# Altium PCB PIC精简开发板.PCBDOC (part 1 of 2)
Units mm, origin at the board's own origin, x right, y up, seen from the top; angles counter-clockwise.
Board outline 152.4 x 101.6 mm, 2 copper layers (Top Layer, Bottom Layer); 40 components, 58 nets, 198 pads, 47 vias.
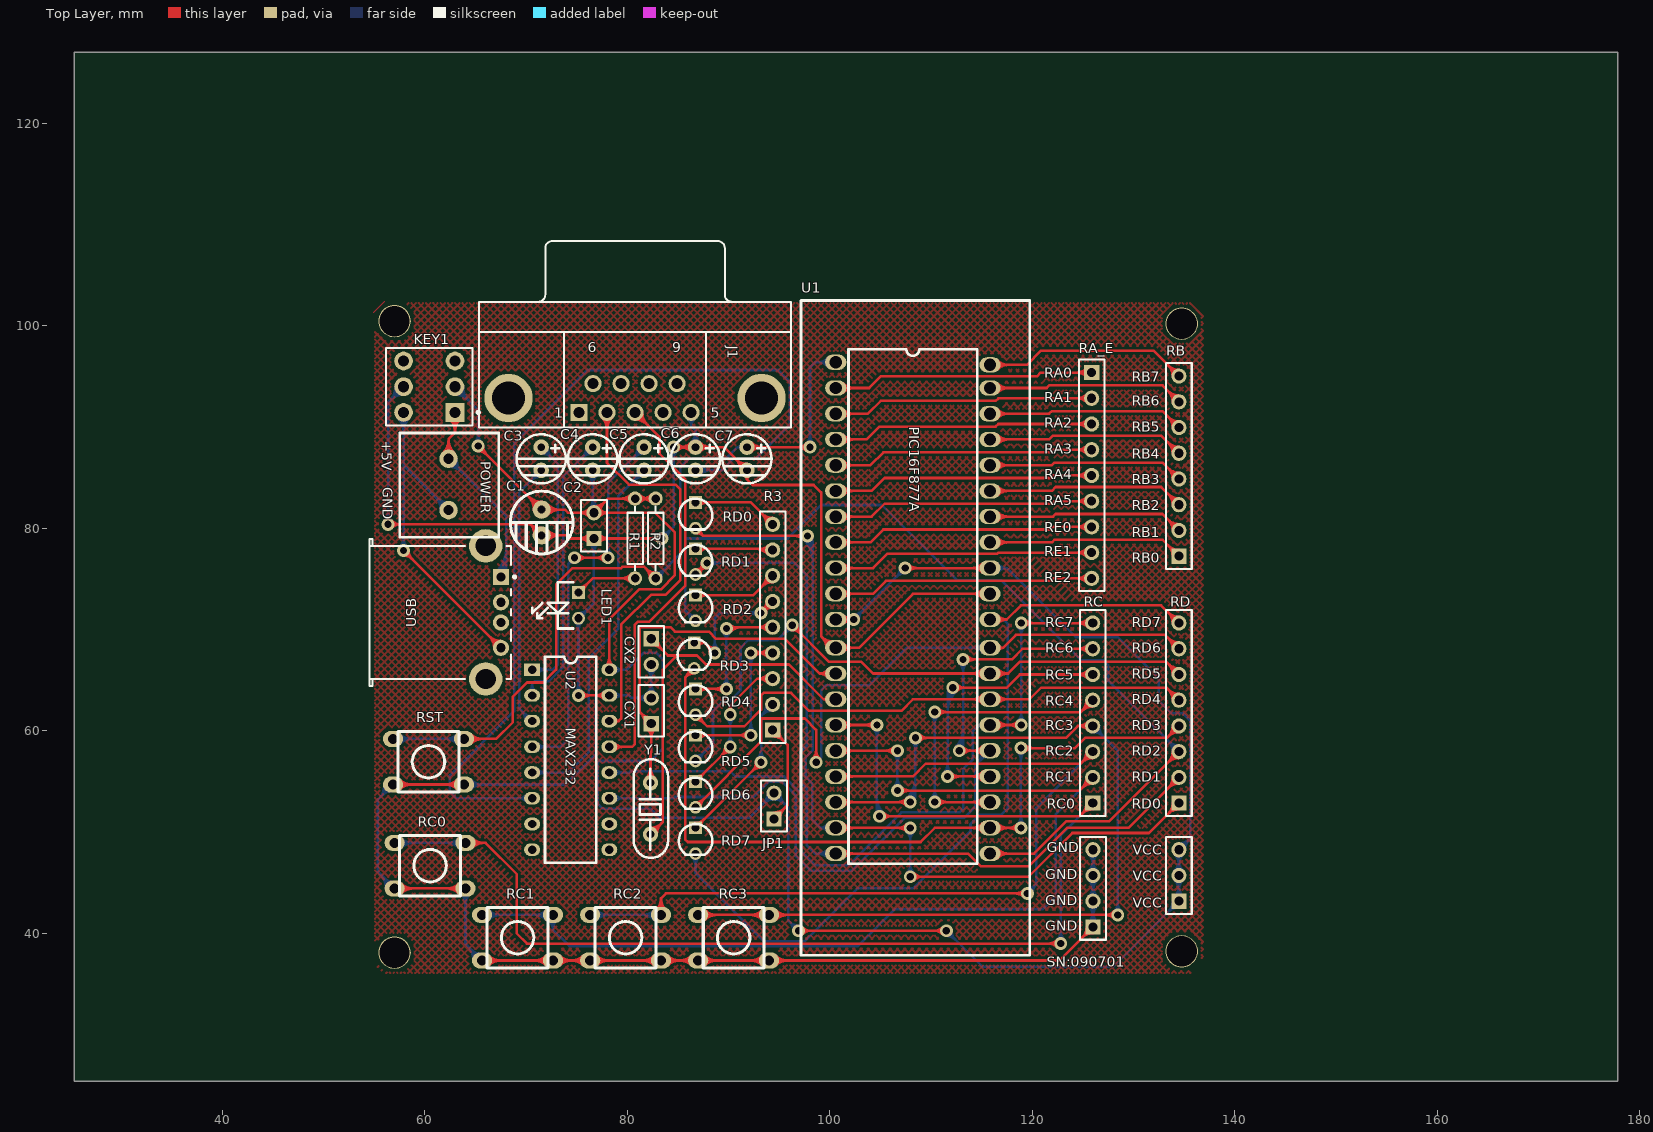
[diagram p0: Top Layer view]
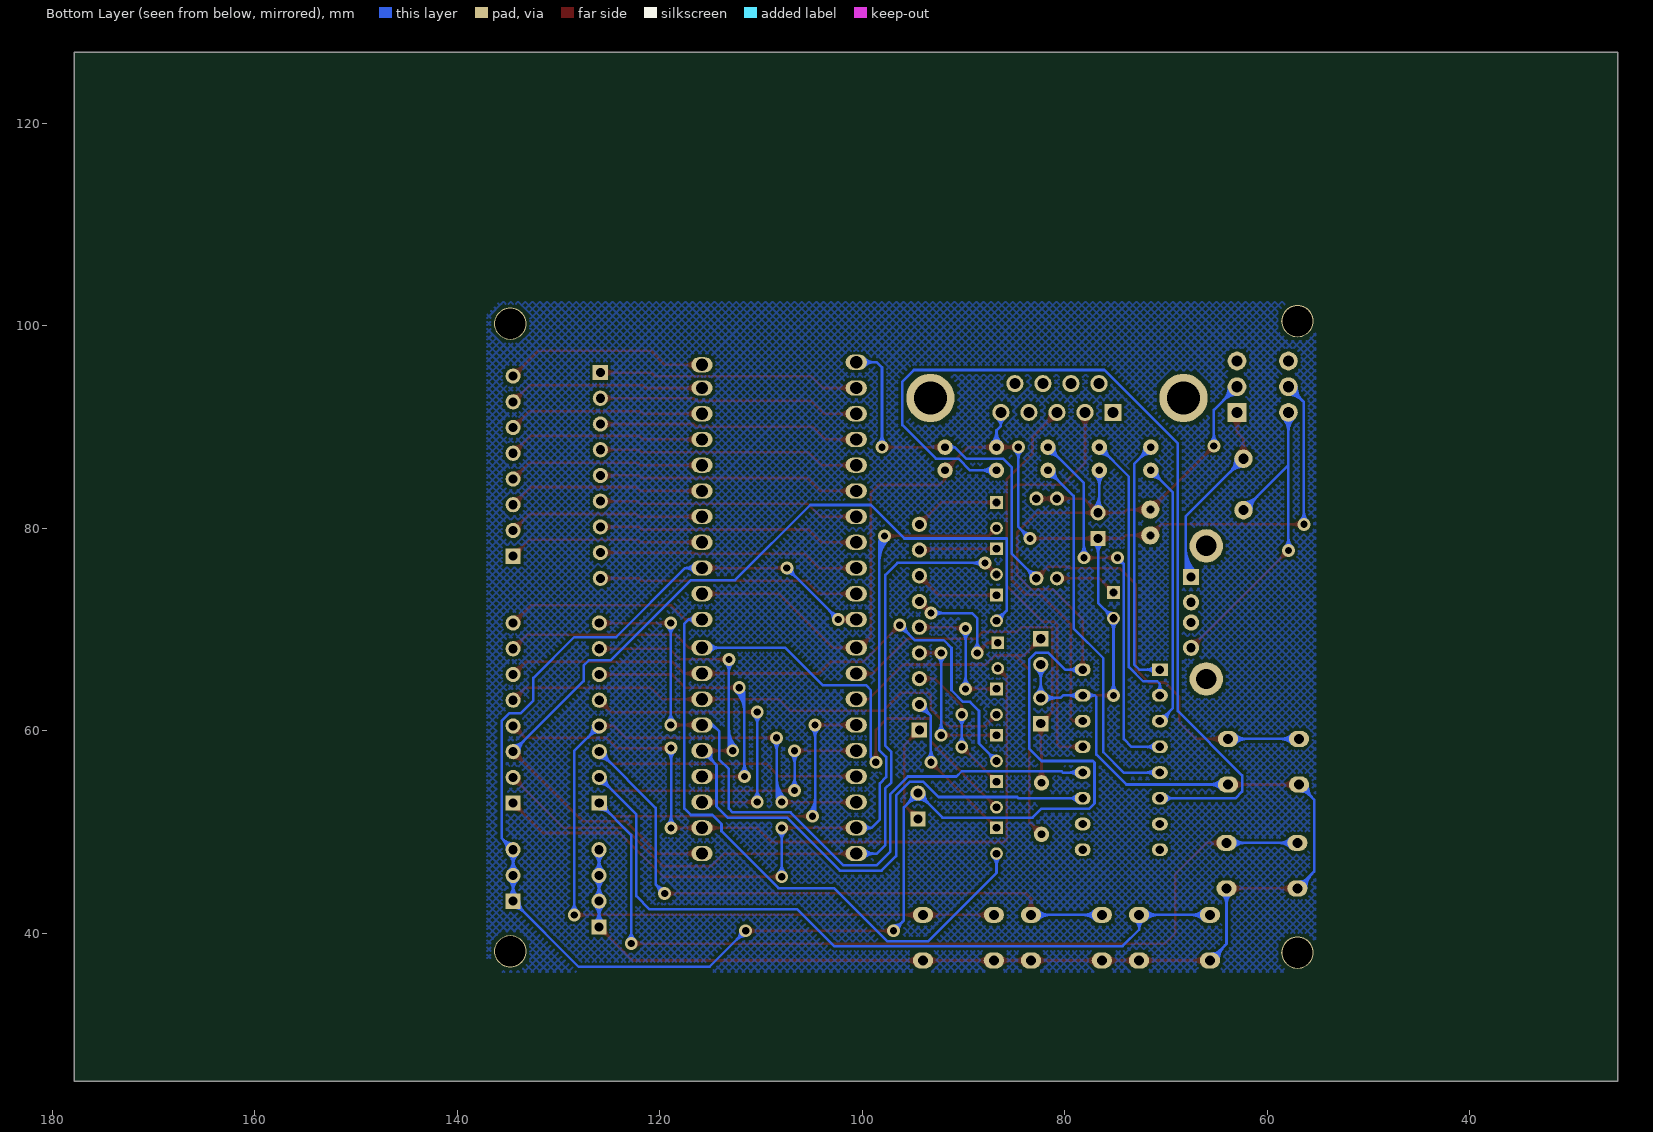
[diagram p1: Bottom Layer view, seen from below]

## Layer stack, top to bottom
Top Layer: signal copper 0.0356
Dielectric: dielectric 0.32, FR-4, Dk 4.8
Bottom Layer: signal copper 0.0356

## Board outline
25.4,25.4 177.8,25.4 177.8,127 25.4,127

## Design rules (kind name [scope] priority, off if disabled: settings)
Clearance [All] p1: gap=0.254
ComponentClearance [All] p1: gap=0.254 collisioncheckmode=3 verticalgap=0.254
PolygonConnect [All] p1: connectstyle=Relief reliefconductorwidth=0.254 reliefentries=4 polygonreliefangle="90 Angle"
RoutingVias [All] p1: holewidth=0.711 width=1.27 viastyle="Through Hole" minholewidth=0.711 minwidth=1.27 maxholewidth=0.711 maxwidth=1.27
SolderMaskExpansion [All] p1: expansion=0.102
TestPointUsage [All] p1: valid=0 allowmultiple=FALSE
Testpoint [All] p1: side=15 testpointundercomponent=TRUE minsize=1.016 maxsize=2.54 preferedsize=1.524 minholesize=0 maxholesize=1.016 preferedholesize=0.813 testpointgrid=0.025 style=1023 order=0123456789
Width [All] p1: maxlimit=0.254 minlimit=0.254 preferedwidth=0.254
17 further rules are at their usual default settings.

## Components (designator, comment, footprint, x,y, rotation, side; value= is the part's Value field where it differs from the comment)
C1 "100uF\25v" C-DJ-6 71.628,79.248 r270 top
C2 "CPDR" CPDR 76.708,80.264 r90 top
C3 "10uf" C-DJ-4 68.961,85.598 r270 top
C4 "10uf" C-DJ-4 74.041,85.598 r270 top
C5 "10uf" C-DJ-4 79.121,85.598 r270 top
C6 "10uf" C-DJ-4 84.201,85.598 r270 top
C7 "10uf" C-DJ-4 89.281,85.598 r270 top
CX1 "30p" HDR1X2 82.369,60.706 r90 top
CX2 "30p" HDR1X2 82.369,69.088 r270 top
GND "" HDR1X4 125.984,40.64 r90 top
J1 "D Connector 9" DSUB1.385-2H9 80.772,102.362 r0 top
JP1 "" HDR1X2 94.488,51.308 r90 top
KEY1 "SW-DPST" DPDT-6 60.452,93.98 r180 top
LED1 "LED" LED 74.676,71.628 r90 top
POWER "" JK128_2 63.5,86.36 r0 top
R1 "4.7k" RSE 80.772,78.994 r270 top
R2 "10k" RSE 82.804,78.994 r90 top
R3 "" HDR-9 94.361,75.311 r90 top
RA_E "" HDR-9 125.857,80.137 r270 top
RB "" HDR-8 134.494,89.916 r90 top
RC "" HDR-8 125.984,65.532 r90 top
RC0 "key1" an-6*6 54.356,51.816 r180 top
RC1 "key2" an-6*6 62.992,44.704 r180 top
RC2 "key3" an-6*6 73.66,44.704 r180 top
RC3 "key4" an-6*6 84.328,44.704 r180 top
RD "" HDR-8 134.494,65.532 r90 top
RD0 "LED" LED_D 88.265,80.772 r270 top
RD1 "LED" LED_D 88.265,76.2 r270 top
RD2 "LED" LED_D 88.265,71.628 r270 top
RD3 "LED" LED_D 88.138,66.929 r270 top
RD4 "LED" LED_D 88.265,62.357 r270 top
RD5 "LED" LED_D 88.265,57.785 r270 top
RD6 "LED" LED_D 88.265,53.213 r270 top
RD7 "LED" LED_D 88.265,48.641 r270 top
RST "" an-6*6 66.548,51.816 r0 top
U1 "PIC16F877A-I/P" AT89S52Pid 132.588,69.596 r0 top
U2 "MAX232" DIP16 70.612,66.04 r0 top
USB "" USB-5V 65.024,68.072 r180 top
VCC "" HDR-3 135.636,49.433 r90 top
Y1 "Y" JZ_ZC 82.296,54.864 r90 top

## Footprints (in the part's own frame and the unit in brackets; to place one, negate y for a bottom-side part, rotate by r counter-clockwise, add the part's x,y. Pads: shape width x height; smd on the part's side, far side on the other; paste and mask are expansions set on the pad)
an-6*6 [mm] "按键"
  oval 2x1.6 hole 1: 1(-9.675,7.381) 1(-2.675,7.381) 2(-9.675,2.881) 2(-2.675,2.881)
  silkscreen extent -9.17,2.13 -3.18,8.13
AT89S52Pid [mil] "AT89S52单片机"
  oval 82.87x59.24 hole 47.75: 1(-1260.15,1054.96) 2(-1260.15,954.96) 3(-1260.15,854.96) 4(-1260.15,754.96) 5(-1260.15,654.96) 6(-1260.15,554.96) 7(-1260.15,454.96) 8(-1260.15,354.96) 9(-1260.15,254.96) 10(-1260.15,154.96) 11(-1260.15,54.96) 12(-1260,-55) 13(-1260,-155) 14(-1260,-255) 15(-1260,-355) 16(-1260,-455) 17(-1260,-555) 18(-1260,-655) 19(-1260,-755) 20(-1260,-855) 21(-660,-855) 22(-660,-755) 23(-660,-655) 24(-660,-555) 25(-660,-455) 26(-660,-355) 27(-660,-255) 28(-660,-155) 29(-660,-55) 30(-660.15,54.96) 31(-660.15,154.96) 32(-660.15,254.96) 33(-660.15,354.96) 34(-660.15,454.96) 35(-660.15,554.96) 36(-660.15,654.96) 37(-660.15,754.96) 38(-660.15,854.96) 39(-660.15,954.96) 40(-660,1045)
  silkscreen extent -1395,-1250 -505,1295
C-DJ-4 [mil] "电容4mm"
  round 60 hole 30: 1(-95,100) 2(-5,100)
  silkscreen extent -145,5 46,196
C-DJ-6 [mm] "电容6mm"
  round 1.8 hole 0.8: 1(-2.591,-0.076) 2(-0.051,-0.076)
  silkscreen extent -4.42,-3.18 1.78,3.02
CPDR [mm] "瓷片电容"
  rect 1.5x1.5 hole 0.9: 1(-1.27,0)
  round 1.5 hole 0.9: 2(1.27,0)
  silkscreen extent -2.54,-1.27 2.54,1.27
DIP16 [mil] "直插16管脚"
  rect 62x49.21 hole 32: 1(-0.15,-0.04)
  oval 62x49.21 hole 32: 2(-0.15,-100.04) 3(-0.15,-200.04) 4(-0.15,-300.04) 5(-0.15,-400.04) 6(-0.15,-500.04) 7(-0.15,-600.04) 8(-0.15,-700.04) 9(299.85,-700.04) 10(299.85,-600.04) 11(299.85,-500.04) 12(299.85,-400.04) 13(299.85,-300.04) 14(299.85,-200.04) 15(299.85,-100.04) 16(299.85,-0.04)
  silkscreen extent 50,-750 250,50
DPDT-6 [mm] "Double-Pole, Double-Throw Switch; 6 Leads"
  rect 1.85x1.85 hole 1.1: 1(-2.54,2.54)
  round 1.85 hole 1.1: 2(-2.54,0) 3(-2.54,-2.54) 4(2.54,-2.54) 5(2.54,0) 6(2.54,2.54)
  silkscreen extent -4.96,-3.81 4.28,3.81
DSUB1.385-2H9 [mm] "Connector; D Subminiature; 9 Position; Right Angle; Pitch 1.385 mm"
  rect 1.69x1.69 hole 1.09: 1(-5.54,-10.92)
  round 1.69 hole 1.09: 2(-2.77,-10.92) 3(0,-10.92) 4(2.77,-10.92) 5(5.54,-10.92) 6(-4.155,-8.08) 7(-1.385,-8.08) 8(1.385,-8.08) 9(4.155,-8.08)
  round 4.76 hole 3.26: 10(-12.495,-9.5) 11(12.495,-9.5)
  silkscreen extent -15.4,-12.4 15.4,6
HDR1X2 [mm] "Connector; Header; 2 Position"
  rect 1.5x1.5 hole 0.9: 1(0,0)
  round 1.5 hole 0.9: 2(2.54,0)
  silkscreen extent -1.27,-1.27 3.81,1.27
HDR1X4 [mm] "Connector; Header; 4 Position"
  rect 1.5x1.5 hole 0.9: 1(0,0)
  round 1.5 hole 0.9: 2(2.54,0) 3(5.08,0) 4(7.62,0)
  silkscreen extent -1.27,-1.27 8.89,1.27
HDR-3 [mm] "3排针"
  rect 1.5x1.5 hole 0.9: 1(-6.253,1.165)
  round 1.5 hole 0.9: 2(-3.713,1.165) 3(-1.173,1.165)
  silkscreen extent -7.52,-0.11 0.1,2.43
HDR-8 [mm] "8排针"
  rect 1.5x1.5 hole 0.9: 1(-12.669,0.023)
  round 1.5 hole 0.9: 2(-10.129,0.023) 3(-7.589,0.023) 4(-5.049,0.023) 5(-2.509,0.023) 6(0.031,0.023) 7(2.571,0.023) 8(5.111,0.023)
  silkscreen extent -13.94,-1.25 6.38,1.29
HDR-9 [mm] "9排针"
  rect 1.5x1.5 hole 0.9: 1(-15.24,0)
  round 1.5 hole 0.9: 2(-12.7,0) 3(-10.16,0) 4(-7.62,0) 5(-5.08,0) 6(-2.54,0) 7(0,0) 8(2.54,0) 9(5.08,0)
  silkscreen extent -16.51,-1.27 6.35,1.27
JK128_2 [mil] "接线端子"
  round 71.81 hole 39.37: 1(-45,20) 2(-45,-180)
  silkscreen extent -235,-285 150,120
JZ_ZC [mil] "晶振"
  round 60 hole 30: 1(-200,0) 2(0,0)
  silkscreen extent -292,-68 92,65
LED [mil] "发光二极管"
  rect 50x50 hole 32: 1(80,-20)
  round 50 hole 32: 2(-20,-20)
  silkscreen extent -60,0 120,160
LED_D [mm] "发光二极管_3mm"
  rect 1.25x1.25 hole 0.75: 1(-1.778,-1.524)
  round 1.25 hole 0.75: 2(0.762,-1.524)
  silkscreen extent -2.16,-3.17 0.89,0.13
RSE [mm] "直插电阻1/8W"
  round 1.4 hole 0.85: 1(-3.937,0) 2(3.937,0)
  silkscreen extent -3.17,-0.76 3.17,0.76
USB-5V [mm] "USB接口"
  rect 1.6x1.6 hole 0.92: 1(-2.503,-7.123)
  round 1.6 hole 0.92: 2(-2.503,-4.624) 3(-2.503,-2.624) 4(-2.503,-0.124)
  round 3.3 hole 2: 5(-1.002,2.947) 6(-1.002,-10.193)
  silkscreen extent -3.98,-10.87 10.5,3.63

## Part data
C1 C3 C4 C5 C6 C7: library part "CAPACITOR POL", "Capacitor"
C2: "瓷片电容"
CX1 CX2: library part CAP, "Capacitor"
GND USB VCC: library part "Header 4", "Header, 4-Pin"
J1: "Receptacle Assembly, 9 Position, Right Angle"
JP1 POWER: library part "Header 2", "Header, 2-Pin"
KEY1: "Double-Pole, Single-Throw Switch"
R1 R2 R3: library part RES2
RA_E: library part PZ_9, "排针——9"
RB RC RD: library part PZ_8, "排针——8"
RC0 RC1 RC2 RC3: library part key
RST: library part SW-PB, "Switch"
U1: "Enhanced FLASH Microcontroller, 8K (x14-Bit words) FLASH, 368 Bytes RAM, 40-Pin PDIP, Standard VDD Range, Industrial Temperature"
Y1: library part CRYSTAL, "Crystal"

## Free pads (board coordinates)
  round 3.2 hole 3: 0(57.023,38.1) 0(57.023,100.457) 0(134.747,38.227) 0(134.747,100.203)

## Via types
v1: diameter 1.27, hole 0.711, Top Layer to Bottom Layer, 47 vias

## Nets (pads, with @x,y where several pads share a name; then routed paths per layer and width w, separated by ;. In a path a pad name is that pad's centre, name@x,y a point inside that pad or via, vN(x,y) a via of type N, cw(c..) or ccw(c..) an arc to the next point about the centre after c; other vN are vias at no path point)
MCLR: C7.1 R2.1 RST.1 U1.1 | length 107.6
  Top Layer w0.254: RST.1@63.873,59.197 67.056,59.197 68.707,60.848 68.707,63.373 70.104,64.77 71.704,64.77 72.974,66.04 72.974,74.447 74.6,76.073 79.4,76.073 79.527,76.2 81.661,76.2 R2.1@82.804,75.057 ; RST.1@64.369,58.901 cw(c65.085,58.185) 65.085,59.197 cw(c65.085,60.208) RST.1@64.369,59.493 ; RST.1@64.549,58.721 cw(c65.698,57.572) 65.698,59.197 cw(c65.698,60.822) RST.1@64.549,59.673 ; R2.1@82.231,75.057 ccw(c80.848,75.057) 81.826,76.035 ccw(c82.804,77.013) R2.1@82.804,75.63 ; R2.1@82.485,75.057 ccw(c81.715,75.057) 82.259,75.602 ccw(c82.804,76.146) R2.1@82.804,75.376 ; C7.1@91.821,88.011 v1(98.044,88.011) ; C7.1@92.09,87.742 cw(c92.741,87.091) 92.741,88.011 cw(c92.741,88.931) C7.1@92.09,88.28 ; C7.1@92.27,87.562 cw(c93.354,86.478) 93.354,88.011 cw(c93.354,89.544) C7.1@92.27,88.46 ; v1@97.685,87.652 ccw(c96.818,86.785) 96.818,88.011 ccw(c96.818,89.237) v1@97.685,88.37
  Bottom Layer w0.254: RST.1@56.873,59.197 RST.1@63.873,59.197 ; RST.1@57.369,58.901 cw(c58.085,58.185) 58.085,59.197 cw(c58.085,60.208) RST.1@57.369,59.493 ; RST.1@57.549,58.721 cw(c58.698,57.572) 58.698,59.197 cw(c58.698,60.822) RST.1@57.549,59.673 ; RST.1@63.197,58.721 ccw(c62.048,57.572) 62.048,59.197 ccw(c62.048,60.822) RST.1@63.197,59.673 ; RST.1@63.377,58.901 ccw(c62.661,58.185) 62.661,59.197 ccw(c62.661,60.208) RST.1@63.377,59.493 ; R2.1@82.804,75.057 85.227,77.48 85.227,85.989 86.106,86.868 89.738,86.868 90.881,88.011 ; R2.1@82.804,75.376 ccw(c82.804,76.146) 83.349,75.602 ccw(c83.893,75.057) R2.1@83.123,75.057 ; R2.1@82.804,75.63 ccw(c82.804,77.013) 83.782,76.035 ccw(c84.76,75.057) R2.1@83.377,75.057 ; C7.1@91.232,87.774 ccw(c90.881,87.633) 90.881,88.011 ; C7.1@91.232,88.248 cw(c90.881,88.389) 90.881,88.011 ; C7.1@91.821,88.011 90.881,88.011 ; v1@97.685,88.37 ccw(c96.818,89.237) 98.044,89.237 ccw(c99.27,89.237) v1@98.403,88.37 ; v1(98.044,88.011) 98.044,95.885 98.551,96.392 U1.1@100.58,96.392 ; U1.1@99.838,95.95 ccw(c98.77,94.882) 98.77,96.392 ccw(c98.77,97.902) U1.1@99.838,96.834 ; U1.1@100.018,96.129 ccw(c99.384,95.495) 99.384,96.392 ccw(c99.384,97.289) U1.1@100.018,96.655
NetC3_1: C3.1 U2.1 | length 30.6
  Bottom Layer w0.254: U2.1@70.608,66.039 72.643,66.039 73.152,66.548 73.152,86.36 C3.1@71.501,88.011 ; U2.1@71.123,65.687 cw(c71.973,64.837) 71.973,66.039 cw(c71.973,67.241) U2.1@71.123,66.391 ; C3.1@71.501,87.376 cw(c71.501,85.843) 72.585,86.927 cw(c73.669,88.011) C3.1@72.136,88.011 ; C3.1@71.501,87.63 cw(c71.501,86.71) 72.151,87.361 cw(c72.802,88.011) C3.1@71.882,88.011
NetC3_2: C3.2 U2.3 | length 32.7
  Bottom Layer w0.254: 69.481,62.086 cw(c68.353,60.959) U2.3@69.948,60.959 ; 69.873,61.694 ccw(c70.446,62.267) U2.3@70.446,61.457 ; 69.914,61.653 cw(c69.221,60.959) U2.3@70.202,60.959 ; U2.3@70.608,60.959 69.342,62.225 69.342,83.566 C3.2@71.501,85.725 ; C3.2@70.866,85.725 cw(c69.333,85.725) 70.417,84.641 cw(c71.501,83.557) C3.2@71.501,85.09 ; C3.2@71.12,85.725 cw(c70.2,85.725) 70.851,85.075 cw(c71.501,84.424) C3.2@71.501,85.344
NetC4_1: C4.1 U2.2 | length 33.4
  Bottom Layer w0.254: U2.2@70.27,63.864 ccw(c69.552,64.639) 70.608,64.639 ; U2.2@70.608,63.499 70.608,64.639 ; U2.2@70.947,63.864 cw(c71.664,64.639) 70.608,64.639 ; C4.1@75.946,88.011 cw(c74.413,88.011) 75.497,86.927 cw(c76.581,85.843) C4.1@76.581,87.376 ; C4.1@76.2,88.011 cw(c75.28,88.011) 75.931,87.361 cw(c76.581,86.71) C4.1@76.581,87.63 ; C4.1@76.581,88.011 73.66,85.09 73.66,66.294 72.263,64.897 70.866,64.897 70.608,64.639
NetC5_1: C5.1 U2.4 | length 50.4
  Top Layer w0.254: v1(74.803,77.089) v1(78.105,77.089) ; v1@75.162,76.73 cw(c76.029,75.863) 76.029,77.089 cw(c76.029,78.315) v1@75.162,77.448 ; v1@77.746,76.73 ccw(c76.879,75.863) 76.879,77.089 ccw(c76.879,78.315) v1@77.746,77.448
  Bottom Layer w0.254: U2.4@70.608,58.419 73.405,58.419 74.168,59.182 74.168,76.454 ; U2.4@71.123,58.067 cw(c71.973,57.217) 71.973,58.419 cw(c71.973,59.621) U2.4@71.123,58.771 ; v1@74.31,76.966 cw(c73.786,76.836) 74.168,76.454 ; v1@74.68,76.596 ccw(c74.55,76.072) 74.168,76.454 ; v1(74.803,77.089) 74.168,76.454 ; v1@77.746,77.448 ccw(c76.879,78.315) 78.105,78.315 ccw(c79.331,78.315) v1@78.464,77.448 ; v1(78.105,77.089) 78.105,84.455 C5.1@81.661,88.011 ; C5.1@81.026,88.011 cw(c79.493,88.011) 80.577,86.927 cw(c81.661,85.843) C5.1@81.661,87.376 ; C5.1@81.28,88.011 cw(c80.36,88.011) 81.011,87.361 cw(c81.661,86.71) C5.1@81.661,87.63
NetC5_2: C5.2 U2.5 | length 42.3
  Bottom Layer w0.254: U2.5@70.608,55.879 74.178,55.879 76.2,57.901 76.2,67.183 79.121,70.104 79.121,83.185 C5.2@81.661,85.725 ; U2.5@71.123,55.527 cw(c71.973,54.677) 71.973,55.879 cw(c71.973,57.081) U2.5@71.123,56.231 ; C5.2@81.026,85.725 cw(c79.493,85.725) 80.577,84.641 cw(c81.661,83.557) C5.2@81.661,85.09 ; C5.2@81.28,85.725 cw(c80.36,85.725) 81.011,85.075 cw(c81.661,84.424) C5.2@81.661,85.344
NetC6_2: C6.2 U2.6 | length 97.3
  Bottom Layer w0.254: U2.6@70.094,52.987 ccw(c69.244,52.137) 69.244,53.339 ccw(c69.244,54.541) U2.6@70.094,53.691 ; U2.6@70.608,53.339 63.145,53.339 62.484,54 62.484,55.601 68.834,61.951 68.834,88.392 76.073,95.631 94.894,95.631 96.037,94.488 96.037,90.195 92.71,86.868 90.5,86.868 89.357,85.725 C6.2@86.741,85.725 ; C6.2@87.01,85.456 cw(c87.661,84.805) 87.661,85.725 cw(c87.661,86.645) C6.2@87.01,85.994 ; C6.2@87.19,85.276 cw(c88.274,84.192) 88.274,85.725 cw(c88.274,87.258) C6.2@87.19,86.174
NetJ1_2: J1.2 U2.14 | length 45.7
  Top Layer w0.254: J1.2@77.494,90.934 cw(c76.269,89.709) 78.002,89.709 cw(c79.735,89.709) J1.2@78.51,90.934 ; J1.2@77.674,91.114 cw(c76.882,90.322) 78.002,90.322 cw(c79.122,90.322) J1.2@78.33,91.114 ; J1.2@78.002,91.442 78.002,86.463 80.162,84.303 84.785,84.303 85.227,83.861 85.227,74.864 83.82,73.457 82.376,73.457 79.4,70.482 79.4,61.214 79.145,60.959 ; U2.14@78.228,60.959 79.145,60.959 ; U2.14@78.848,60.763 cw(c79.145,60.636) 79.145,60.959 ; U2.14@78.848,61.155 ccw(c79.145,61.282) 79.145,60.959
NetJ1_3: J1.3 U2.13 | length 46.5
  Top Layer w0.254: U2.13@78.228,58.419 80.493,58.419 80.73,58.656 80.73,70.46 81.026,70.756 82.16,70.756 85.735,74.332 85.735,84.811 83.185,87.361 83.185,89.029 J1.3@80.772,91.442 ; U2.13@78.743,58.067 cw(c79.593,57.217) 79.593,58.419 cw(c79.593,59.621) U2.13@78.743,58.771 ; J1.3@80.772,90.724 cw(c80.772,88.991) 81.998,90.216 cw(c83.223,91.442) J1.3@81.49,91.442 ; J1.3@80.772,90.978 cw(c80.772,89.858) 81.564,90.65 cw(c82.356,91.442) J1.3@81.236,91.442
NetJP1_1: JP1.1 R3.1 | length 17.5
  Top Layer w0.254: R3.1@94.361,59.448 cw(c94.361,57.944) 95.425,59.007 cw(c96.488,60.071) R3.1@94.984,60.071 ; R3.1@94.361,59.702 cw(c94.361,58.811) 94.991,59.441 cw(c95.621,60.071) R3.1@94.73,60.071 ; R3.1@94.361,60.071 95.834,58.598 95.834,52.654 JP1.1@94.488,51.308 ; JP1.1@94.488,51.677 ccw(c94.488,52.568) 95.118,51.938 ccw(c95.748,51.308) JP1.1@94.857,51.308 ; JP1.1@94.488,51.931 ccw(c94.488,53.435) 95.552,52.372 ccw(c96.615,51.308) JP1.1@95.111,51.308
NetKEY1_1: KEY1.1 POWER.1 USB.1 | length 42.6
  Top Layer w0.254: POWER.1@61.802,87.423 ccw(c60.462,88.763) 62.357,88.763 ccw(c64.252,88.763) POWER.1@62.912,87.423 ; POWER.1@61.982,87.243 ccw(c61.075,88.15) 62.357,88.15 ccw(c63.639,88.15) POWER.1@62.732,87.243 ; POWER.1@62.357,86.868 62.357,88.824 62.992,89.459 KEY1.1@62.992,91.44 ; KEY1.1@62.428,90.876 cw(c61.065,89.513) 62.992,89.513 cw(c64.919,89.513) KEY1.1@63.556,90.876 ; KEY1.1@62.607,91.055 cw(c61.679,90.127) 62.992,90.127 cw(c64.305,90.127) KEY1.1@63.377,91.055
  Bottom Layer w0.254: POWER.1@62.357,86.083 cw(c62.357,84.188) 63.697,85.528 cw(c65.037,86.868) POWER.1@63.142,86.868 ; POWER.1@62.357,86.337 cw(c62.357,85.055) 63.263,85.962 cw(c64.17,86.868) POWER.1@62.888,86.868 ; POWER.1@62.357,86.868 68.072,81.153 68.072,75.921 67.527,75.921 USB.1@67.527,75.195 ; USB.1@67.051,75.671 ccw(c64.585,78.137) 68.072,78.137 ; USB.1@67.23,75.492 ccw(c65.198,77.524) 68.072,77.524 ; USB.1@67.41,75.312 ccw(c65.811,76.911) 68.072,76.911 ; USB.1@67.589,75.133 ccw(c66.424,76.298) 68.072,76.298
NetKEY1_6: KEY1.6 POWER.2 USB.4 | length 51.6
  Top Layer w0.254: v1@57.912,77.302 cw(c57.912,76.076) 58.779,76.943 cw(c59.646,77.81) v1@58.42,77.81 ; v1(57.912,77.81) USB.4@67.527,68.196 ; USB.4@66.854,68.196 ccw(c65.229,68.196) 66.378,69.344 ccw(c67.527,70.493) USB.4@67.527,68.869 ; USB.4@67.108,68.196 ccw(c66.096,68.196) 66.811,68.911 ccw(c67.527,69.626) USB.4@67.527,68.615
  Bottom Layer w0.254: KEY1.6@57.348,90.876 cw(c55.985,89.513) 57.912,89.513 cw(c59.839,89.513) KEY1.6@58.476,90.876 ; KEY1.6@57.527,91.055 cw(c56.599,90.127) 57.912,90.127 cw(c59.225,90.127) KEY1.6@58.297,91.055 ; v1@57.553,78.169 ccw(c56.686,79.036) 57.912,79.036 ccw(c59.138,79.036) v1@58.271,78.169 ; v1(57.912,77.81) 57.912,86.233 ; KEY1.6@57.912,91.44 57.912,86.233 ; POWER.2@61.572,81.788 ccw(c59.677,81.788) 61.017,83.128 ccw(c62.357,84.468) POWER.2@62.357,82.573 ; POWER.2@61.826,81.788 ccw(c60.544,81.788) 61.451,82.694 ccw(c62.357,83.601) POWER.2@62.357,82.319 ; POWER.2@62.357,81.788 57.912,86.233
NetLED1_1: LED1.1 R1.2 | length 11.5
  Top Layer w0.254: LED1.1@75.184,73.66 76.581,75.057 R1.2@80.772,75.057 ; LED1.1@75.184,74.168 ccw(c75.184,75.394) 76.051,74.527 ccw(c76.918,73.66) LED1.1@75.692,73.66 ; R1.2@80.367,74.652 ccw(c79.389,73.674) 79.389,75.057 ccw(c79.389,76.44) R1.2@80.367,75.462 ; R1.2@80.546,74.831 ccw(c80.002,74.287) 80.002,75.057 ccw(c80.002,75.827) R1.2@80.546,75.283
NetR3_2: R3.2 RD7.1 | length 24.9
  Top Layer w0.254: RD7.1@86.741,50.419 v1(93.218,56.896) ; RD7.1@86.741,50.917 ccw(c86.741,52.119) 87.591,51.269 ccw(c88.441,50.419) RD7.1@87.239,50.419 ; v1@92.71,56.896 cw(c91.484,56.896) 92.351,56.029 cw(c93.218,55.162) v1@93.218,56.388
  Bottom Layer w0.254: v1@92.859,57.255 ccw(c91.992,58.122) 93.218,58.122 ccw(c94.444,58.122) v1@93.577,57.255 ; v1(93.218,56.896) 93.218,61.468 R3.2@94.361,62.611 ; R3.2@93.738,62.611 cw(c92.234,62.611) 93.297,61.547 cw(c94.361,60.484) R3.2@94.361,61.988 ; R3.2@93.992,62.611 cw(c93.101,62.611) 93.731,61.981 cw(c94.361,61.351) R3.2@94.361,62.242
NetR3_3: R3.3 RD6.1 | length 26.7
  Top Layer w0.254: RD6.1@86.741,54.991 v1(90.17,58.42) ; RD6.1@86.741,55.489 ccw(c86.741,56.691) 87.591,55.841 ccw(c88.441,54.991) RD6.1@87.239,54.991 ; v1@89.662,58.42 cw(c88.436,58.42) 89.303,57.553 cw(c90.17,56.686) v1@90.17,57.912 ; v1@89.912,62.033 ccw(c89.646,62.484) 90.17,62.484 ; v1(90.17,61.595) 90.17,62.484 ; v1@90.428,62.033 cw(c90.694,62.484) 90.17,62.484 ; R3.3@93.92,64.71 ccw(c92.857,63.647) 92.857,65.151 ccw(c92.857,66.655) R3.3@93.92,65.592 ; R3.3@94.1,64.89 ccw(c93.47,64.26) 93.47,65.151 ccw(c93.47,66.042) R3.3@94.1,65.412 ; R3.3@94.361,65.151 92.837,65.151 90.17,62.484
  Bottom Layer w0.254: v1@89.811,58.779 ccw(c88.944,59.646) 90.17,59.646 ccw(c91.396,59.646) v1@90.529,58.779 ; v1@89.811,61.236 cw(c88.944,60.369) 90.17,60.369 cw(c91.396,60.369) v1@90.529,61.236 ; v1(90.17,58.42) v1(90.17,61.595)
NetR3_4: R3.4 RD5.1 | length 29.1
  Top Layer w0.254: RD5.1@86.741,59.563 v1(92.202,59.563) ; RD5.1@87.093,59.211 cw(c87.943,58.361) 87.943,59.563 cw(c87.943,60.765) RD5.1@87.093,59.915 ; v1@91.843,59.204 ccw(c90.976,58.337) 90.976,59.563 ccw(c90.976,60.789) v1@91.843,59.922 ; v1(92.202,67.691) R3.4@94.361,67.691 ; v1@92.561,67.332 cw(c93.428,66.465) 93.428,67.691 cw(c93.428,68.917) v1@92.561,68.05 ; R3.4@93.92,67.25 ccw(c92.857,66.187) 92.857,67.691 ccw(c92.857,69.195) R3.4@93.92,68.132 ; R3.4@94.1,67.43 ccw(c93.47,66.8) 93.47,67.691 ccw(c93.47,68.582) R3.4@94.1,67.952
  Bottom Layer w0.254: v1@91.843,59.922 ccw(c90.976,60.789) 92.202,60.789 ccw(c93.428,60.789) v1@92.561,59.922 ; v1@91.843,67.332 cw(c90.976,66.465) 92.202,66.465 cw(c93.428,66.465) v1@92.561,67.332 ; v1(92.202,59.563) v1(92.202,67.691)
NetR3_5: R3.5 RD4.1 | length 27.8
  Top Layer w0.254: RD4.1@86.741,64.135 v1(89.789,64.135) ; RD4.1@87.093,63.783 cw(c87.943,62.933) 87.943,64.135 cw(c87.943,65.337) RD4.1@87.093,64.487 ; v1@89.43,63.776 ccw(c88.563,62.909) 88.563,64.135 ccw(c88.563,65.361) v1@89.43,64.494 ; v1(89.789,70.104) 89.916,70.231 R3.5@94.361,70.231 ; v1@89.969,69.924 cw(c90.709,69.184) 90.709,70.231 cw(c90.709,71.024) v1@90.148,70.463 ; v1@90.148,69.745 cw(c91.322,68.571) 91.322,70.231 ; R3.5@93.92,69.79 ccw(c92.857,68.727) 92.857,70.231 ccw(c92.857,71.735) R3.5@93.92,70.672 ; R3.5@94.1,69.97 ccw(c93.47,69.34) 93.47,70.231 ccw(c93.47,71.122) R3.5@94.1,70.492
  Bottom Layer w0.254: v1@89.43,64.494 ccw(c88.563,65.361) 89.789,65.361 ccw(c91.015,65.361) v1@90.148,64.494 ; v1@89.43,69.745 cw(c88.563,68.878) 89.789,68.878 cw(c91.015,68.878) v1@90.148,69.745 ; v1(89.789,64.135) v1(89.789,70.104)
NetR3_6: R3.6 RD3.1 | length 25.2
  Top Layer w0.254: RD3.1@86.614,68.707 87.63,68.707 ; RD3.1@87.008,68.402 cw(c87.63,67.92) 87.63,68.707 ; RD3.1@87.008,69.012 ccw(c87.63,69.494) 87.63,68.707 ; v1@88.138,67.691 ccw(c86.912,67.691) 87.779,68.558 ccw(c88.646,69.425) v1@88.646,68.199 ; v1(88.646,67.691) 87.63,68.707 ; v1(93.218,71.628) R3.6@94.361,72.771 ; v1@93.218,72.136 ccw(c93.218,73.362) 94.085,72.495 ccw(c94.952,71.628) v1@93.726,71.628 ; R3.6@93.738,72.771 cw(c92.234,72.771) 93.297,71.707 cw(c94.361,70.644) R3.6@94.361,72.148 ; R3.6@93.992,72.771 cw(c93.101,72.771) 93.731,72.141 cw(c94.361,71.511) R3.6@94.361,72.402
  Bottom Layer w0.254: v1@88.287,68.05 ccw(c87.42,68.917) 88.646,68.917 ccw(c89.872,68.917) v1@89.005,68.05 ; v1(88.646,67.691) 88.646,71.12 89.154,71.628 v1(93.218,71.628) ; v1@92.859,71.269 ccw(c91.992,70.402) 91.992,71.628 ccw(c91.992,72.854) v1@92.859,71.987
NetR3_7: R3.7 RD2.1 | length 14.1
  Top Layer w0.254: RD2.1@86.741,73.406 92.456,73.406 R3.7@94.361,75.311 ; RD2.1@87.093,73.054 cw(c87.943,72.204) 87.943,73.406 cw(c87.943,74.608) RD2.1@87.093,73.758 ; R3.7@93.738,75.311 cw(c92.234,75.311) 93.297,74.247 cw(c94.361,73.184) R3.7@94.361,74.688 ; R3.7@93.992,75.311 cw(c93.101,75.311) 93.731,74.681 cw(c94.361,74.051) R3.7@94.361,74.942
NetR3_8: R3.8 RD1.1 | length 13
  Top Layer w0.254: RD1.1@86.741,77.978 94.234,77.978 R3.8@94.361,77.851 ; RD1.1@87.093,77.626 cw(c87.943,76.776) 87.943,77.978 cw(c87.943,79.18) RD1.1@87.093,78.33 ; 92.55,77.978 cw(c92.55,76.04) R3.8@93.92,77.41 ; R3.8@93.92,78.292 cw(c93.164,79.048) 93.164,77.978 cw(c93.164,76.654) R3.8@94.1,77.59
NetR3_9: R3.9 RD0.1 | length 14.2
  Top Layer w0.254: RD0.1@86.741,82.55 92.202,82.55 R3.9@94.361,80.391 ; RD0.1@87.093,82.198 cw(c87.943,81.348) 87.943,82.55 cw(c87.943,83.752) RD0.1@87.093,82.902 ; R3.9@93.738,80.391 ccw(c92.234,80.391) 93.297,81.455 ccw(c94.361,82.518) R3.9@94.361,81.014 ; R3.9@93.992,80.391 ccw(c93.101,80.391) 93.731,81.021 ccw(c94.361,81.651) R3.9@94.361,80.76
OSC1: CX1.1 U1.13 Y1.2 | length 51.5
  Top Layer w0.254: CX1.1@81.746,60.706 ccw(c80.242,60.706) 81.305,61.77 ccw(c82.369,62.833) CX1.1@82.369,61.329 ; Y1.2@81.847,55.313 ccw(c80.763,56.397) 82.296,56.397 ccw(c83.829,56.397) Y1.2@82.745,55.313 ; CX1.1@81.928,60.265 cw(c80.865,59.202) 82.369,59.202 cw(c83.873,59.202) CX1.1@82.81,60.265 ; CX1.1@82,60.706 ccw(c81.109,60.706) 81.739,61.336 ccw(c82.369,61.966) CX1.1@82.369,61.075 ; Y1.2@82.027,55.133 ccw(c81.376,55.784) 82.296,55.784 ccw(c83.216,55.784) Y1.2@82.565,55.133 ; CX1.1@82.108,60.445 cw(c81.478,59.815) 82.369,59.815 cw(c83.26,59.815) CX1.1@82.63,60.445 ; Y1.2@82.296,54.864 82.296,57.807 82.369,57.88 CX1.1@82.369,60.706 81.238,61.837 81.238,70.231 84.277,70.231 84.709,69.799 88.062,69.799 88.773,69.088 95.555,69.088 98.984,65.659 ; U1.13@99.795,65.269 ccw(c98.984,64.62) 98.984,65.659 ; U1.13@99.795,66.049 cw(c98.984,66.698) 98.984,65.659 ; U1.13@99.994,65.427 ccw(c99.512,65.042) 99.512,65.659 ccw(c99.512,66.276) U1.13@99.994,65.891 ; U1.13@100.584,65.659 98.984,65.659
OSC2: CX2.1 U1.14 Y1.1 | length 47.8
  Top Layer w0.254: Y1.1@82.296,49.784 83.515,51.003 83.515,66.04 84.912,67.437 ; Y1.1@82.296,50.165 ccw(c82.296,51.085) 82.946,50.434 ccw(c83.597,49.784) Y1.1@82.677,49.784 ; Y1.1@82.296,50.419 ccw(c82.296,51.952) 83.38,50.868 ccw(c84.464,49.784) Y1.1@82.931,49.784 ; CX2.1@82.369,68.465 cw(c82.369,66.961) 83.433,68.024 cw(c84.496,69.088) CX2.1@82.992,69.088 ; CX2.1@82.369,68.719 cw(c82.369,67.828) 82.999,68.458 cw(c83.629,69.088) CX2.1@82.738,69.088 ; CX2.1@82.369,69.088 84.02,67.437 84.912,67.437 ; U1.14@99.696,62.905 ccw(c99.39,62.793) 99.39,63.119 ; U1.14@99.696,63.333 cw(c99.39,63.445) 99.39,63.119 ; U1.14@100.584,63.119 99.39,63.119 ; 84.912,67.437 86.868,67.437 87.757,66.548 95.961,66.548 99.39,63.119
RA0: RA_E.1 U1.2 | length 33.5
  Top Layer w0.254: U1.2@100.58,93.852 103.885,93.852 105.029,94.996 120.447,94.996 120.828,95.377 RA_E.1@125.857,95.377 ; U1.2@101.143,93.589 cw(c101.777,92.955) 101.777,93.852 cw(c101.777,94.749) U1.2@101.143,94.115 ; U1.2@101.322,93.41 cw(c102.39,92.342) 102.39,93.852 cw(c102.39,95.362) U1.2@101.322,94.294 ; RA_E.1@125.416,94.936 ccw(c124.353,93.873) 124.353,95.377 ccw(c124.353,96.881) RA_E.1@125.416,95.818 ; RA_E.1@125.596,95.116 ccw(c124.966,94.486) 124.966,95.377 ccw(c124.966,96.268) RA_E.1@125.596,95.638
RA1: RA_E.2 U1.3 | length 33.5
  Top Layer w0.254: U1.3@100.58,91.312 103.76,91.312 105.031,92.583 116.383,92.583 116.637,92.837 RA_E.2@125.857,92.837 ; U1.3@101.143,91.049 cw(c101.777,90.415) 101.777,91.312 cw(c101.777,92.209) U1.3@101.143,91.575 ; U1.3@101.322,90.87 cw(c102.39,89.802) 102.39,91.312 cw(c102.39,92.822) U1.3@101.322,91.754 ; RA_E.2@125.416,92.396 ccw(c124.353,91.333) 124.353,92.837 ccw(c124.353,94.341) RA_E.2@125.416,93.278 ; RA_E.2@125.596,92.576 ccw(c124.966,91.946) 124.966,92.837 ccw(c124.966,93.728) RA_E.2@125.596,93.098
RA2: RA_E.3 U1.4 | length 33.5
  Top Layer w0.254: U1.4@100.58,88.772 103.633,88.772 104.904,90.043 116.383,90.043 116.637,90.297 RA_E.3@125.857,90.297 ; U1.4@101.143,88.509 cw(c101.777,87.875) 101.777,88.772 cw(c101.777,89.669) U1.4@101.143,89.035 ; U1.4@101.322,88.33 cw(c102.39,87.262) 102.39,88.772 cw(c102.39,90.282) U1.4@101.322,89.214 ; RA_E.3@125.416,89.856 ccw(c124.353,88.793) 124.353,90.297 ccw(c124.353,91.801) RA_E.3@125.416,90.738 ; RA_E.3@125.596,90.036 ccw(c124.966,89.406) 124.966,90.297 ccw(c124.966,91.188) RA_E.3@125.596,90.558
RA3: RA_E.4 U1.5 | length 33.5
  Top Layer w0.254: U1.5@100.58,86.232 104.014,86.232 105.285,87.503 121.793,87.503 122.047,87.757 RA_E.4@125.857,87.757 ; U1.5@101.143,85.969 cw(c101.777,85.335) 101.777,86.232 cw(c101.777,87.129) U1.5@101.143,86.495 ; U1.5@101.322,85.79 cw(c102.39,84.722) 102.39,86.232 cw(c102.39,87.742) U1.5@101.322,86.674 ; RA_E.4@125.416,87.316 ccw(c124.353,86.253) 124.353,87.757 ccw(c124.353,89.261) RA_E.4@125.416,88.198 ; RA_E.4@125.596,87.496 ccw(c124.966,86.866) 124.966,87.757 ccw(c124.966,88.648) RA_E.4@125.596,88.018
RA4: RA_E.5 U1.6 | length 33.5
  Top Layer w0.254: U1.6@100.58,83.692 104.139,83.692 105.41,84.963 121.793,84.963 122.047,85.217 RA_E.5@125.857,85.217 ; U1.6@101.143,83.429 cw(c101.777,82.795) 101.777,83.692 cw(c101.777,84.589) U1.6@101.143,83.955 ; U1.6@101.322,83.25 cw(c102.39,82.182) 102.39,83.692 cw(c102.39,85.202) U1.6@101.322,84.134 ; RA_E.5@125.416,84.776 ccw(c124.353,83.713) 124.353,85.217 ccw(c124.353,86.721) RA_E.5@125.416,85.658 ; RA_E.5@125.596,84.956 ccw(c124.966,84.326) 124.966,85.217 ccw(c124.966,86.108) RA_E.5@125.596,85.478
RA5: RA_E.6 U1.7 | length 33.5
  Top Layer w0.254: U1.7@100.58,81.152 104.139,81.152 105.41,82.423 121.92,82.423 122.174,82.677 RA_E.6@125.857,82.677 ; U1.7@101.143,80.889 cw(c101.777,80.255) 101.777,81.152 cw(c101.777,82.049) U1.7@101.143,81.415 ; U1.7@101.322,80.71 cw(c102.39,79.642) 102.39,81.152 cw(c102.39,82.662) U1.7@101.322,81.594 ; RA_E.6@125.416,82.236 ccw(c124.353,81.173) 124.353,82.677 ccw(c124.353,84.181) RA_E.6@125.416,83.118 ; RA_E.6@125.596,82.416 ccw(c124.966,81.786) 124.966,82.677 ccw(c124.966,83.568) RA_E.6@125.596,82.938
RB0: RB.1 U1.33 | length 27
  Top Layer w0.254: U1.33@115.82,78.612 121.919,78.612 122.174,78.867 132.851,78.867 RB.1@134.471,77.247 ; U1.33@116.383,78.349 cw(c117.017,77.715) 117.017,78.612 cw(c117.017,79.509) U1.33@116.383,78.875 ; U1.33@116.562,78.17 cw(c117.63,77.102) 117.63,78.612 cw(c117.63,80.122) U1.33@116.562,79.054 ; RB.1@133.848,77.247 ccw(c132.344,77.247) 133.407,78.311 ccw(c134.471,79.374) RB.1@134.471,77.87 ; RB.1@134.102,77.247 ccw(c133.211,77.247) 133.841,77.877 ccw(c134.471,78.507) RB.1@134.471,77.616
RB1: RB.2 U1.34 | length 27
  Top Layer w0.254: U1.34@115.82,81.152 122.046,81.152 122.301,81.407 132.851,81.407 RB.2@134.471,79.787 ; U1.34@116.383,80.889 cw(c117.017,80.255) 117.017,81.152 cw(c117.017,82.049) U1.34@116.383,81.415 ; U1.34@116.562,80.71 cw(c117.63,79.642) 117.63,81.152 cw(c117.63,82.662) U1.34@116.562,81.594 ; RB.2@133.848,79.787 ccw(c132.344,79.787) 133.407,80.851 ccw(c134.471,81.914) RB.2@134.471,80.41 ; RB.2@134.102,79.787 ccw(c133.211,79.787) 133.841,80.417 ccw(c134.471,81.047) RB.2@134.471,80.156
RB2: RB.3 U1.35 | length 27.1
  Top Layer w0.254: U1.35@115.82,83.692 121.919,83.692 122.301,84.074 132.724,84.074 RB.3@134.471,82.327 ; U1.35@116.383,83.429 cw(c117.017,82.795) 117.017,83.692 cw(c117.017,84.589) U1.35@116.383,83.955 ; U1.35@116.562,83.25 cw(c117.63,82.182) 117.63,83.692 cw(c117.63,85.202) U1.35@116.562,84.134 ; RB.3@133.848,82.327 ccw(c132.344,82.327) 133.407,83.391 ccw(c134.471,84.454) RB.3@134.471,82.95 ; RB.3@134.102,82.327 ccw(c133.211,82.327) 133.841,82.957 ccw(c134.471,83.587) RB.3@134.471,82.696
RB3: RB.4 U1.36 | length 27
  Top Layer w0.254: U1.36@115.82,86.232 121.919,86.232 122.174,86.487 132.851,86.487 RB.4@134.471,84.867 ; U1.36@116.383,85.969 cw(c117.017,85.335) 117.017,86.232 cw(c117.017,87.129) U1.36@116.383,86.495 ; U1.36@116.562,85.79 cw(c117.63,84.722) 117.63,86.232 cw(c117.63,87.742) U1.36@116.562,86.674 ; RB.4@133.848,84.867 ccw(c132.344,84.867) 133.407,85.931 ccw(c134.471,86.994) RB.4@134.471,85.49 ; RB.4@134.102,84.867 ccw(c133.211,84.867) 133.841,85.497 ccw(c134.471,86.127) RB.4@134.471,85.236
RB4: RB.5 U1.37 | length 27.1
  Top Layer w0.254: U1.37@115.82,88.772 121.665,88.772 122.047,89.154 132.724,89.154 RB.5@134.471,87.407 ; U1.37@116.383,88.509 cw(c117.017,87.875) 117.017,88.772 cw(c117.017,89.669) U1.37@116.383,89.035 ; U1.37@116.562,88.33 cw(c117.63,87.262) 117.63,88.772 cw(c117.63,90.282) U1.37@116.562,89.214 ; RB.5@133.848,87.407 ccw(c132.344,87.407) 133.407,88.471 ccw(c134.471,89.534) RB.5@134.471,88.03 ; RB.5@134.102,87.407 ccw(c133.211,87.407) 133.841,88.037 ccw(c134.471,88.667) RB.5@134.471,87.776
RB5: RB.6 U1.38 | length 27
  Top Layer w0.254: U1.38@115.82,91.312 121.665,91.312 121.92,91.567 132.851,91.567 RB.6@134.471,89.947 ; U1.38@116.383,91.049 cw(c117.017,90.415) 117.017,91.312 cw(c117.017,92.209) U1.38@116.383,91.575 ; U1.38@116.562,90.87 cw(c117.63,89.802) 117.63,91.312 cw(c117.63,92.822) U1.38@116.562,91.754 ; RB.6@133.848,89.947 ccw(c132.344,89.947) 133.407,91.011 ccw(c134.471,92.074) RB.6@134.471,90.57 ; RB.6@134.102,89.947 ccw(c133.211,89.947) 133.841,90.577 ccw(c134.471,91.207) RB.6@134.471,90.316
RB6: RB.7 U1.39 | length 27
  Top Layer w0.254: U1.39@115.82,93.852 121.411,93.852 121.666,94.107 132.851,94.107 RB.7@134.471,92.487 ; U1.39@116.383,93.589 cw(c117.017,92.955) 117.017,93.852 cw(c117.017,94.749) U1.39@116.383,94.115 ; U1.39@116.562,93.41 cw(c117.63,92.342) 117.63,93.852 cw(c117.63,95.362) U1.39@116.562,94.294 ; RB.7@133.848,92.487 ccw(c132.344,92.487) 133.407,93.551 ccw(c134.471,94.614) RB.7@134.471,93.11 ; RB.7@134.102,92.487 ccw(c133.211,92.487) 133.841,93.117 ccw(c134.471,93.747) RB.7@134.471,92.856
RB7: RB.8 U1.40 | length 27.8
  Top Layer w0.254: U1.40@115.824,96.139 119.456,96.139 120.853,97.536 131.962,97.536 RB.8@134.471,95.027 ; U1.40@116.387,95.876 cw(c117.021,95.242) 117.021,96.139 cw(c117.021,97.036) U1.40@116.387,96.402 ; U1.40@116.566,95.697 cw(c117.634,94.629) 117.634,96.139 cw(c117.634,97.649) U1.40@116.566,96.581 ; RB.8@133.848,95.027 ccw(c132.344,95.027) 133.407,96.091 ccw(c134.471,97.154) RB.8@134.471,95.65 ; RB.8@134.102,95.027 ccw(c133.211,95.027) 133.841,95.657 ccw(c134.471,96.287) RB.8@134.471,95.396
RC0: RC0.2 RC.1 U1.15 | length 160.4
  Top Layer w0.254: RC0.2@64.031,48.935 66,48.935 69.088,45.847 69.088,40.005 70.104,38.989 v1(122.809,38.989) ; RC0.2@64.527,48.639 cw(c65.243,47.924) 65.243,48.935 cw(c65.243,49.947) RC0.2@64.527,49.231 ; RC0.2@64.707,48.459 cw(c65.856,47.31) 65.856,48.935 cw(c65.856,50.56) RC0.2@64.707,49.411 ; U1.15@100.584,60.579 v1(104.648,60.579) ; U1.15@101.147,60.316 cw(c101.781,59.682) 101.781,60.579 cw(c101.781,61.476) U1.15@101.147,60.842 ; U1.15@101.326,60.137 cw(c102.394,59.069) 102.394,60.579 cw(c102.394,62.089) U1.15@101.326,61.021 ; v1@104.289,60.22 ccw(c103.422,59.353) 103.422,60.579 ccw(c103.422,61.805) v1@104.289,60.938 ; v1(104.902,51.562) 124.66,51.562 RC.1@125.961,52.863 ; v1@105.261,51.203 cw(c106.128,50.336) 106.128,51.562 cw(c106.128,52.788) v1@105.261,51.921 ; v1@122.45,38.63 ccw(c121.583,37.763) 121.583,38.989 ccw(c121.583,40.215) v1@122.45,39.348 ; RC.1@125.338,52.863 cw(c123.834,52.863) 124.897,51.799 cw(c125.961,50.736) RC.1@125.961,52.24 ; RC.1@125.592,52.863 cw(c124.701,52.863) 125.331,52.233 cw(c125.961,51.603) RC.1@125.961,52.494
  Bottom Layer w0.254: RC0.2@57.031,48.935 RC0.2@64.031,48.935 ; RC0.2@57.527,48.639 cw(c58.243,47.924) 58.243,48.935 cw(c58.243,49.947) RC0.2@57.527,49.231 ; RC0.2@57.707,48.459 cw(c58.856,47.31) 58.856,48.935 cw(c58.856,50.56) RC0.2@57.707,49.411 ; RC0.2@63.355,48.459 ccw(c62.206,47.31) 62.206,48.935 ccw(c62.206,50.56) RC0.2@63.355,49.411 ; RC0.2@63.535,48.639 ccw(c62.819,47.924) 62.819,48.935 ccw(c62.819,49.947) RC0.2@63.535,49.231 ; v1@104.289,60.22 cw(c103.422,59.353) 104.648,59.353 cw(c105.874,59.353) v1@105.007,60.22 ; v1@104.543,51.921 ccw(c104.289,52.175) 104.648,52.175 ccw(c105.515,52.175) v1(104.902,51.562) 104.648,51.816 v1(104.648,60.579) ; 104.648,52.788 ccw(c106.128,52.788) v1@105.082,51.742 ; 104.648,53.402 ccw(c106.742,53.402) v1@105.261,51.921 ; v1@122.45,39.348 ccw(c121.583,40.215) 122.809,40.215 ccw(c124.035,40.215) v1@123.168,39.348 ; v1(122.809,38.989) 122.809,49.711 RC.1@125.961,52.863 ; RC.1@125.338,52.863 cw(c123.834,52.863) 124.897,51.799 cw(c125.961,50.736) RC.1@125.961,52.24 ; RC.1@125.592,52.863 cw(c124.701,52.863) 125.331,52.233 cw(c125.961,51.603) RC.1@125.961,52.494
RC1: RC1.2 RC.2 U1.16 | length 134.6
  Top Layer w0.254: U1.16@100.584,58.039 v1(106.68,58.039) ; U1.16@101.147,57.776 cw(c101.781,57.142) 101.781,58.039 cw(c101.781,58.936) U1.16@101.147,58.302 ; U1.16@101.326,57.597 cw(c102.394,56.529) 102.394,58.039 cw(c102.394,59.549) U1.16@101.326,58.481 ; v1@106.321,57.68 ccw(c105.454,56.813) 105.454,58.039 ccw(c105.454,59.265) v1@106.321,58.398 ; v1(106.68,54.102) 124.66,54.102 RC.2@125.961,55.403 ; v1@107.039,53.743 cw(c107.906,52.876) 107.906,54.102 cw(c107.906,55.328) v1@107.039,54.461 ; RC.2@125.338,55.403 cw(c123.834,55.403) 124.897,54.339 cw(c125.961,53.276) RC.2@125.961,54.78 ; RC.2@125.592,55.403 cw(c124.701,55.403) 125.331,54.773 cw(c125.961,54.143) RC.2@125.961,55.034
  Bottom Layer w0.254: RC1.2@65.667,41.823 RC1.2@72.644,41.823 ; RC1.2@66.163,41.527 cw(c66.879,40.812) 66.879,41.823 cw(c66.879,42.835) RC1.2@66.163,42.119 ; RC1.2@66.343,41.347 cw(c67.492,40.198) 67.492,41.823 cw(c67.492,43.448) RC1.2@66.343,42.299 ; RC1.2@71.991,41.347 ccw(c70.842,40.198) 70.842,41.823 ccw(c70.842,43.448) RC1.2@71.991,42.299 ; RC1.2@72.171,41.527 ccw(c71.455,40.812) 71.455,41.823 ccw(c71.455,42.835) RC1.2@72.171,42.119 ; RC1.2@72.223,41.318 cw(c71.403,40.386) 72.644,40.386 ; RC1.2@72.39,41.509 cw(c71.897,40.948) 72.644,40.948 ; 72.644,40.91 cw(c73.388,40.91) RC1.2@72.927,41.494 ; RC1.2@72.667,41.823 RC1.2@72.644,41.823 ; RC1.2@73.084,41.295 ccw(c73.803,40.386) 72.644,40.386 ; v1@106.321,54.461 ccw(c105.454,55.328) 106.68,55.328 ccw(c107.906,55.328) v1@107.039,54.461 ; v1@106.321,57.68 cw(c105.454,56.813) 106.68,56.813 cw(c107.906,56.813) v1@107.039,57.68 ; v1(106.68,54.102) v1(106.68,58.039) ; RC.2@125.338,55.403 cw(c123.834,55.403) 124.897,54.339 cw(c125.961,53.276) RC.2@125.961,54.78 ; RC.2@125.592,55.403 cw(c124.701,55.403) 125.331,54.773 cw(c125.961,54.143) RC.2@125.961,55.034 ; RC.2@125.961,55.403 122.301,51.743 122.301,43.688 120.98,42.367 106.401,42.367 102.768,38.735 74.295,38.735 72.644,40.386 ; 72.644,40.386 RC1.2@72.644,41.823
RC2: RC2.2 RC.3 U1.17 | length 115.7
  Top Layer w0.254: RC2.2@82.859,42.299 ccw(c81.71,43.448) 83.335,43.448 ccw(c84.96,43.448) RC2.2@83.811,42.299 ; RC2.2@83.039,42.119 ccw(c82.323,42.835) 83.335,42.835 ccw(c84.347,42.835) RC2.2@83.631,42.119 ; RC2.2@83.335,41.823 83.335,43.457 83.82,43.942 v1(119.507,43.942) ; U1.17@100.584,55.499 108.204,55.499 109.474,56.769 124.787,56.769 RC.3@125.961,57.943 ; U1.17@101.147,55.236 cw(c101.781,54.602) 101.781,55.499 cw(c101.781,56.396) U1.17@101.147,55.762 ; U1.17@101.326,55.057 cw(c102.394,53.989) 102.394,55.499 cw(c102.394,57.009) U1.17@101.326,55.941 ; v1@119.148,43.583 ccw(c118.281,42.716) 118.281,43.942 ccw(c118.281,45.168) v1@119.148,44.301 ; RC.3@125.338,57.943 cw(c123.834,57.943) 124.897,56.879 cw(c125.961,55.816) RC.3@125.961,57.32 ; RC.3@125.592,57.943 cw(c124.701,57.943) 125.331,57.313 cw(c125.961,56.683) RC.3@125.961,57.574
  Bottom Layer w0.254: RC2.2@76.335,41.823 RC2.2@83.335,41.823 ; RC2.2@76.831,41.527 cw(c77.547,40.812) 77.547,41.823 cw(c77.547,42.835) RC2.2@76.831,42.119 ; RC2.2@77.011,41.347 cw(c78.16,40.198) 78.16,41.823 cw(c78.16,43.448) RC2.2@77.011,42.299 ; RC2.2@82.659,41.347 ccw(c81.51,40.198) 81.51,41.823 ccw(c81.51,43.448) RC2.2@82.659,42.299 ; RC2.2@82.839,41.527 ccw(c82.123,40.812) 82.123,41.823 ccw(c82.123,42.835) RC2.2@82.839,42.119 ; v1(119.507,43.942) 120.396,44.831 120.396,52.378 RC.3@125.961,57.943 ; v1@119.507,44.45 ccw(c119.507,45.676) 120.374,44.809 ccw(c121.241,43.942) v1@120.015,43.942 ; RC.3@125.338,57.943 cw(c123.834,57.943) 124.897,56.879 cw(c125.961,55.816) RC.3@125.961,57.32 ; RC.3@125.592,57.943 cw(c124.701,57.943) 125.331,57.313 cw(c125.961,56.683) RC.3@125.961,57.574
RC3: RC3.2 RC.4 U1.18 | length 133.3
  Top Layer w0.254: RC3.2@87.003,41.823 RC3.2@94.003,41.823 v1(128.437,41.823) ; RC3.2@87.499,41.527 cw(c88.215,40.812) 88.215,41.823 cw(c88.215,42.835) RC3.2@87.499,42.119 ; RC3.2@87.679,41.347 cw(c88.828,40.198) 88.828,41.823 cw(c88.828,43.448) RC3.2@87.679,42.299 ; RC3.2@93.327,41.347 ccw(c92.178,40.198) 92.178,41.823 ccw(c92.178,43.448) RC3.2@93.327,42.299 ; RC3.2@93.507,41.527 ccw(c92.791,40.812) 92.791,41.823 ccw(c92.791,42.835) RC3.2@93.507,42.119 ; RC3.2@94.499,41.527 cw(c95.215,40.812) 95.215,41.823 cw(c95.215,42.835) RC3.2@94.499,42.119 ; RC3.2@94.679,41.347 cw(c95.828,40.198) 95.828,41.823 cw(c95.828,43.448) RC3.2@94.679,42.299 ; U1.18@100.584,52.959 v1(107.95,52.959) ; U1.18@101.147,52.696 cw(c101.781,52.062) 101.781,52.959 cw(c101.781,53.856) U1.18@101.147,53.222 ; U1.18@101.326,52.517 cw(c102.394,51.449) 102.394,52.959 cw(c102.394,54.469) U1.18@101.326,53.401 ; v1@107.591,52.6 ccw(c106.724,51.733) 106.724,52.959 ccw(c106.724,54.185) v1@107.591,53.318 ; v1(108.458,59.309) 123.317,59.309 124.491,60.483 ; v1@108.817,58.95 cw(c109.684,58.083) 109.684,59.309 cw(c109.684,60.535) v1@108.817,59.668 ; RC.4@125.513,60.05 ccw(c124.491,59.06) 124.491,60.483 ; RC.4@125.513,60.916 cw(c124.491,61.906) 124.491,60.483 ; RC.4@125.696,60.226 ccw(c125.09,59.64) 125.09,60.483 ccw(c125.09,61.326) RC.4@125.696,60.74 ; RC.4@125.961,60.483 124.491,60.483 ; v1@128.078,41.464 ccw(c127.211,40.597) 127.211,41.823 ccw(c127.211,43.05) v1@128.078,42.182
  Bottom Layer w0.254: v1@107.591,53.318 ccw(c105.497,55.412) 108.458,55.412 ; v1@107.77,53.139 ccw(c106.11,54.799) 108.458,54.799 ; v1@108.099,58.95 cw(c107.232,58.083) 108.458,58.083 cw(c109.684,58.083) v1@108.817,58.95 ; v1@108.13,52.779 ccw(c107.337,53.572) 108.458,53.572 ; v1@108.169,53.417 ccw(c108.278,53.647) 108.458,53.467 ; v1@108.408,53.178 cw(c108.638,53.287) 108.458,53.467 ; 108.458,54.185 cw(c106.724,54.185) v1(107.95,52.959) 108.458,53.467 ; v1(108.458,59.309) 108.458,53.467 ; RC.4@125.961,59.86 cw(c125.961,58.356) 127.025,59.419 cw(c128.088,60.483) RC.4@126.584,60.483 ; RC.4@125.961,60.114 cw(c125.961,59.223) 126.591,59.853 cw(c127.221,60.483) RC.4@126.33,60.483 ; RC.4@125.961,60.483 128.437,58.007 v1(128.437,41.823) ; v1@128.078,42.182 ccw(c127.211,43.05) 128.437,43.05 ccw(c129.664,43.05) v1@128.796,42.182